# Altium PCB Pcb_BuckXL6009.PcbDoc
Units mm, origin at the board's own origin, x right, y up, seen from the top; angles counter-clockwise.
Board outline 45.34 x 25.4 mm, 2 copper layers (Top Layer, Bottom Layer); 9 components, 5 nets, 23 pads, 10 vias.
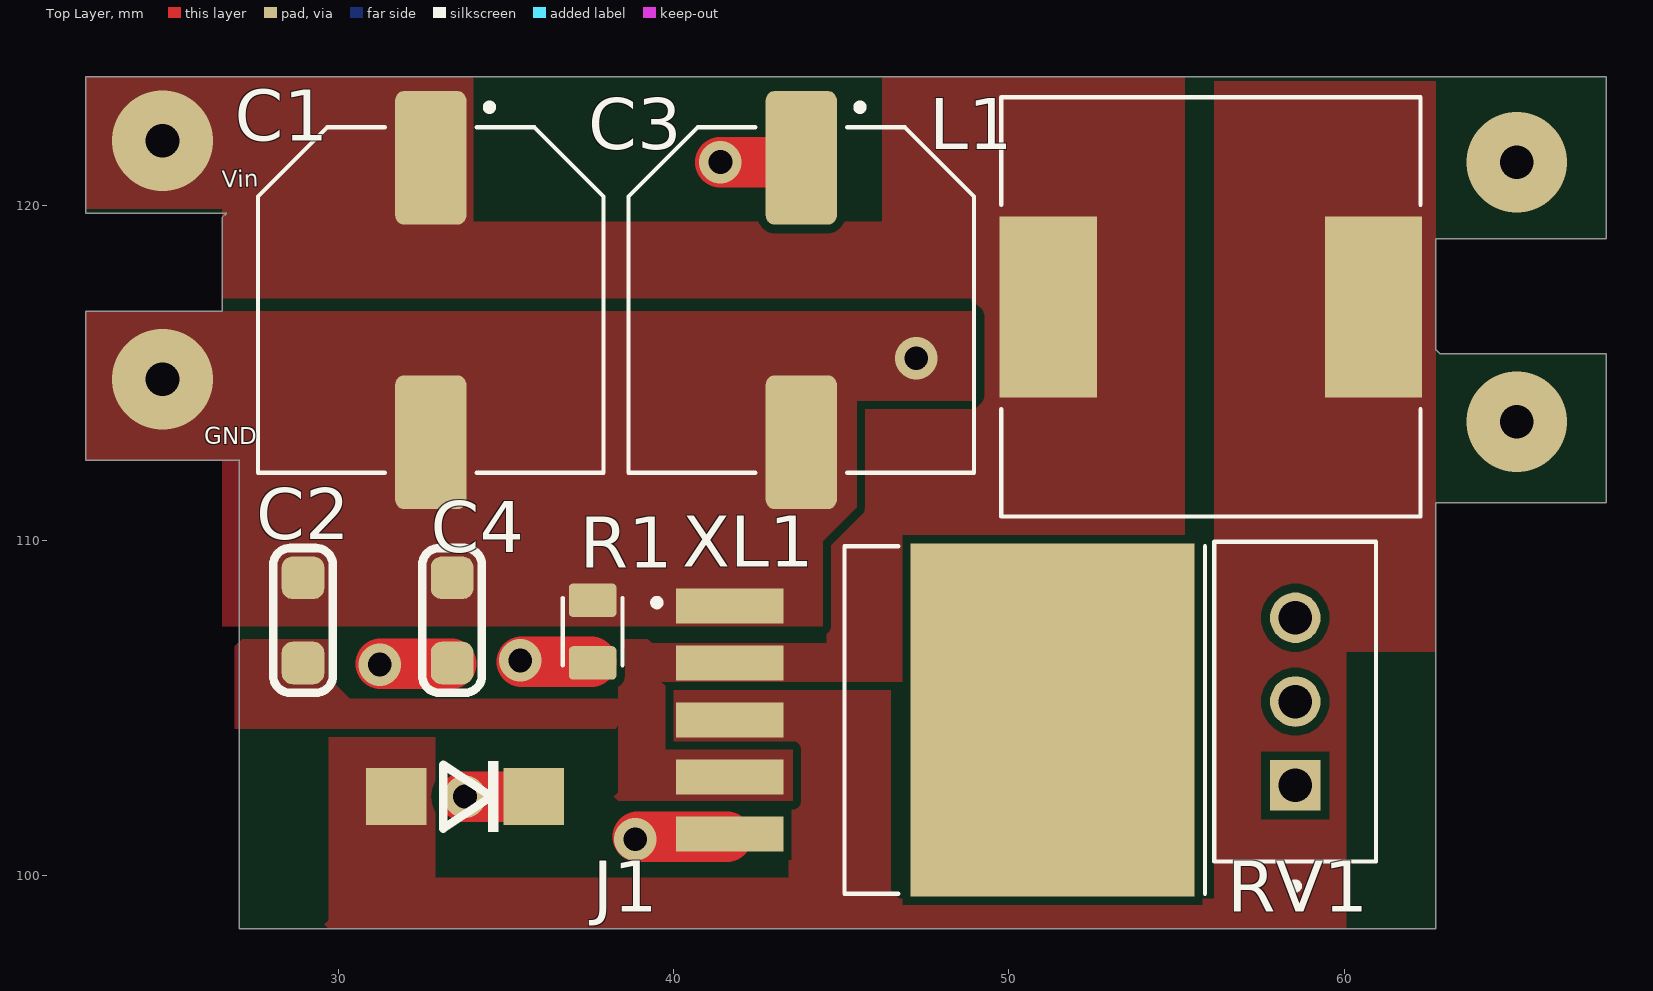
[diagram p0: Top Layer view]
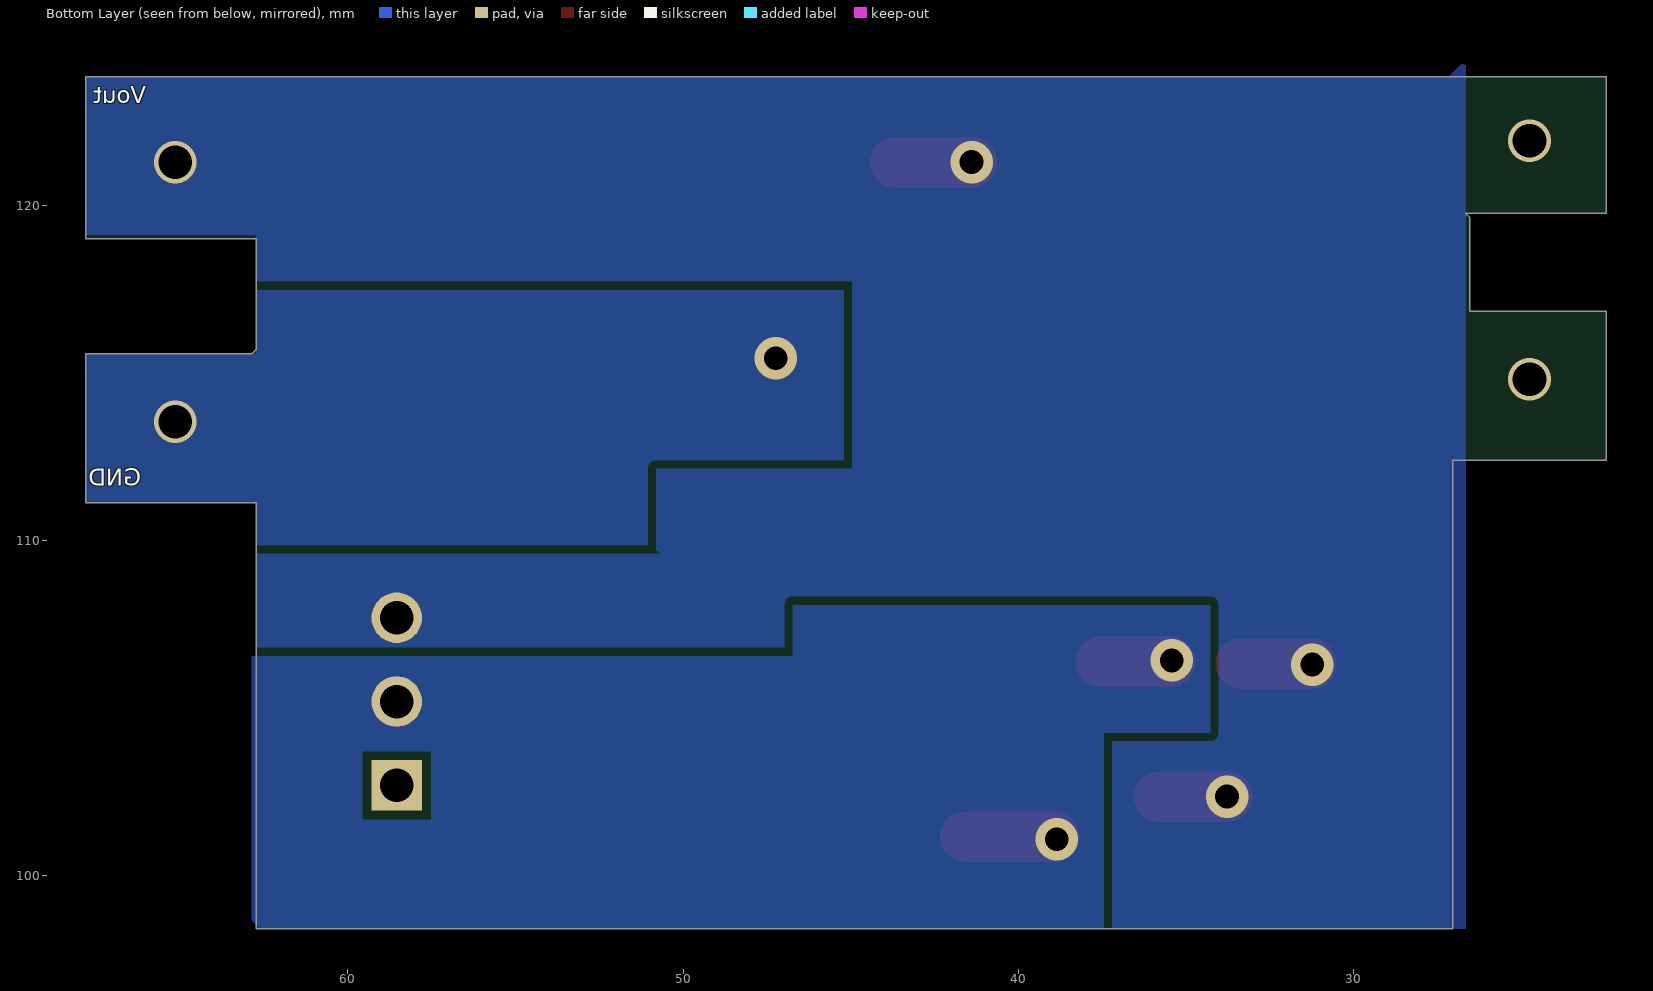
[diagram p1: Bottom Layer view, seen from below]
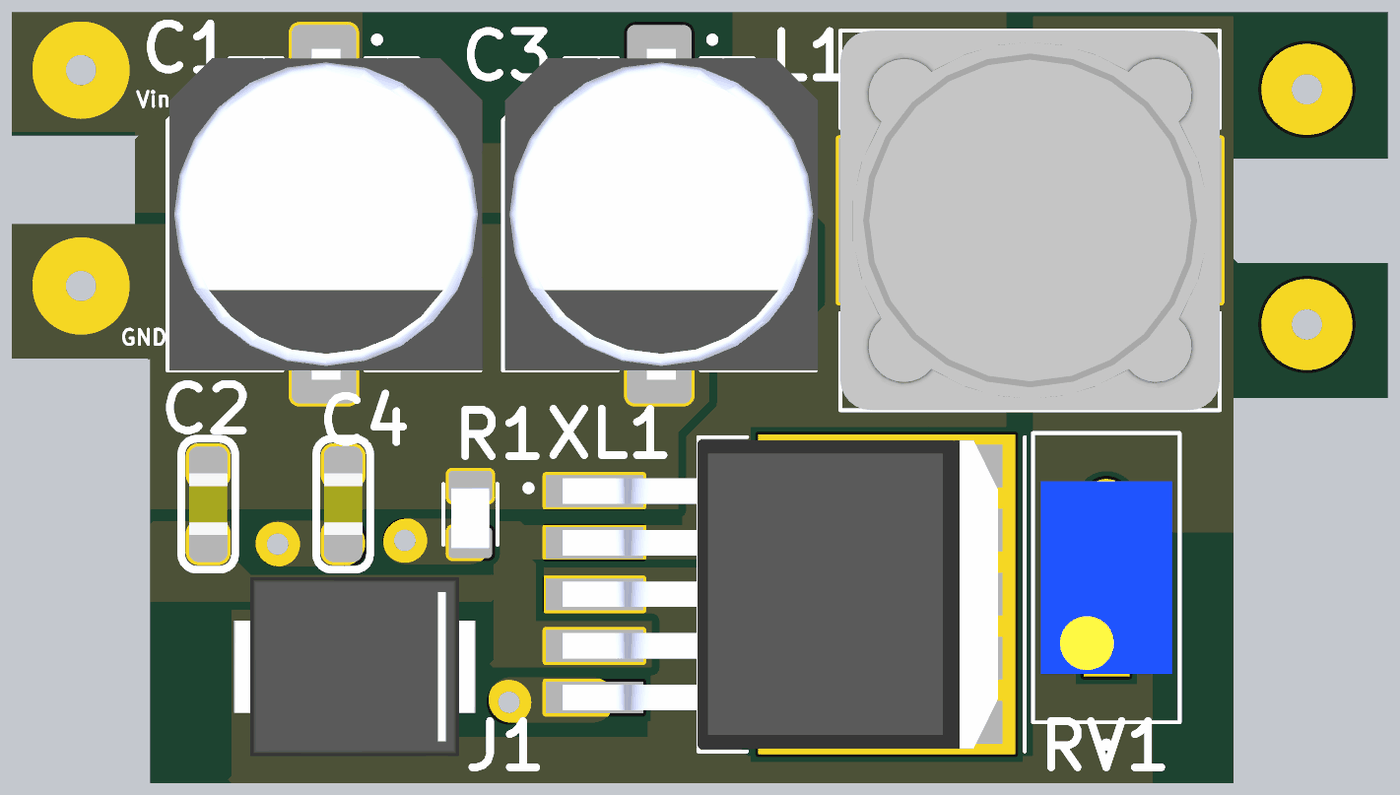
[diagram p2: 3D render of the assembled board from above, using the file's embedded part models]

## Layer stack, top to bottom
Top Solder: solder mask 0.0102, Solder Resist, Dk 3.5
Top Layer: signal copper 0.0356
Dielectric 1: dielectric 0.32, FR-4, Dk 4.8
Bottom Layer: signal copper 0.0356
Bottom Solder: solder mask 0.0102, Solder Resist, Dk 3.5

## Board outline
67.818,118.999 62.738,118.999 62.738,115.697 62.865,115.57 67.818,115.57 67.818,111.125 62.738,111.125 62.738,98.425 27.051,98.425 27.051,112.395 22.479,112.395 22.479,116.84 26.543,116.84 26.543,119.634 26.67,119.761 22.479,119.761 22.479,123.825 67.818,123.825

## Design rules (kind name [scope] priority, off if disabled: settings)
Clearance [All] p1: gap=0.254 ignorepadtopadclearanceinfootprint=FALSE except(0: Arc-Hole Track-Hole SMDPad-Hole THPad-Hole Via-Hole Fill-Hole Poly-Hole Region-Hole Text-Hole)
PolygonConnect [All] p1: connectstyle=Direct reliefconductorwidth=0.254 reliefentries=4 polygonreliefangle="90 Angle" airgapwidth=0.254
RoutingVias [All] p1: holewidth=0.711 width=1.27 viastyle="Through Hole" minholewidth=0.711 minwidth=1.27 maxholewidth=0.711 maxwidth=1.27
SolderMaskExpansion [All] p1: expansion=0.102 istentingtop=FALSE
Width [All] p1: maxlimit=1.5 minlimit=0.254 preferedwidth=0.254
30 further rules are at their usual default settings.

## Classes and differential pairs
component class Sch_BuckXL6009: C1 C2 C3 J1 L1 R1 RV1

## Components (designator, comment, footprint, x,y, rotation, side; value= is the part's Value field where it differs from the comment)
C1 "C_Aluminum" C_Aluminum 32.766,117.172 r270 top
C2 "Capacitor Ceramic" CAP_0805 28.956,107.618 r270 top value=33p
C3 "C_Aluminum" C_Aluminum 43.815,117.172 r270 top
C4 "Capacitor Ceramic" CAP_0805 33.401,107.618 r270 top value=33p
J1 "Diode" Diode(Wr) 33.782,102.362 r180 top
L1 "L_1260_330M" L_1260_330M 56.031,116.967 r180 top
R1 "Resistor_0805" Resistor_0805 37.592,107.283 r90 top
RV1 "Potentiometer" Potentiometer_ThroughHole 58.547,105.196 r90 top
XL1 "XL6009" XL6009 47.808,104.648 r0 top

## Footprints (in the part's own frame and the unit in brackets; to place one, negate y for a bottom-side part, rotate by r counter-clockwise, add the part's x,y. Pads: shape width x height; smd on the part's side, far side on the other; paste and mask are expansions set on the pad)
C_Aluminum [mm]
  rrect25% 3.99x2.12 smd: 1(-4.24,0) 2(4.24,0)
  silkscreen extent -5.85,-5.15 5.15,5.15, body extent -5.45,-5.08 5.45,5.22, height 11.05
CAP_0805 [mil]
  rrect50% 50x50 smd: 1(-50,0) 2(50,0)
  silkscreen extent -85,-35 85,35, body extent -40,-25 40,25, height 24
Diode(Wr) [mm]
  rect 1.8x1.7 smd: A(2.05,0) C(-2.05,0)
  silkscreen extent -1,-1.05 0.65,1.05, body extent -3.97,-2.85 3.97,3.05, height 2.47
L_1260_330M [mm]
  rect 2.9x5.4 smd: 1(-4.85,0) 2(4.85,0)
  silkscreen extent -6.25,-6.25 6.25,6.25, body extent -6.25,-6.25 6.25,6.25, height 6
Potentiometer_ThroughHole [mm]
  rect 1.508x1.508 hole 1: 1(-2.5,0)
  round 1.508 hole 1: 2(0,0) 3(2.5,0)
  silkscreen extent -5.6,-2.41 4.77,2.42, body extent -3.18,-2.16 3.17,2.16, height 7.87
Resistor_0805 [mm]
  rrect25% 1x1.42 smd: 1(-0.935,0) 2(0.935,0)
  silkscreen extent -1,-0.89 1,0.89, body extent -1.13,-0.62 0.87,0.63, height 0.6
XL6009 [mm]
  rect 3.21x1.05 smd: 1(-6.13,3.4) 2(-6.13,1.7) 3(-6.13,0) 4(-6.13,-1.7) 5(-6.13,-3.4)
  rect 8.46x10.53 smd paste-6: 6(3.5,0)
  silkscreen extent -8.4,-5.18 8.05,5.18, body extent -7.17,-5.08 7.17,5.08

## Part data
C1 C3: "220ÂµF 50V Aluminum Electrolytic Capacitors Radial, Can - SMD 1000 Hrs @ 105Â°C", Package="Radial Nichicon", Availability=Unavailable, MF=Nichicon, MP=UWT1H221MNL1GS, Price=None, SnapEDA_Link=https://www.snapeda.com/parts/UWT1H221MNL1GS/Nichicon/view-part/566503/?ref=snap
C2 C4: library part "Capacitor SMD", "Capacitor", LatestRevisionDate=17-Jul-2002, LatestRevisionNote="Re-released for DXP Platform.", PackageReference=RAD-0.3, Published=8-Jun-2000, Publisher="Altium Limited"
J1: "Diode; Repetitive Reverse Voltage Max, Vrrm: 40V; Forward Current, If(AV): 3A; Forward Surge Current Max, Ifsm: 100A;...", Package="SMC-2 ON Semiconductor", Availability=Good, Check_prices=https://www.snapeda.com/parts/SS34/ON%20Semiconductor/view-part/547583/?ref=eda, MF="ON Semiconductor", MP=SS34, Price=None, Purchase-URL=https://pricing.snapeda.com/search/part/SS34/?ref=eda, SnapEDA_Link=https://www.snapeda.com/parts/SS34/ON%20Semiconductor/view-part/547583/?ref=snap
L1: "33ÂµH Shielded Wirewound Inductor 3A 60mOhm Max Nonstandard", Package="Nonstandard Bourns", Availability=Unavailable, MF=Bourns, MP=SRR1260-330M, Price=None, SnapEDA_Link=https://www.snapeda.com/parts/SRR1260-330M/Bourns/view-part/378985/?ref=snap
R1: "CRG0805 1% 24K", Package=None, Availability=Unavailable, MP=1623163-1, Price=None
RV1: library part Potentiometer_ThroughHole, "25 kOhms 0.5W, 1/2W PC Pins Through Hole Trimmer Potentiometer Cermet 25 Turn Top Adjustment", Package="6332 Bourns", Availability=Bad, DigiKey-Purchase-URL=https://snapeda.com/shop?store=DigiKey&id=1448352, MF=Bourns, Mouser-Purchase-URL=https://snapeda.com/shop?store=Mouser&id=1448352, MP=PV36W253C01B00, Price=None, SnapEDA_Link=https://www.snapeda.com/parts/PV36W253C01B00/Bourns/view-part/1448352/?ref=snap
XL1: "The XL6009 regulator is a wide input range, current mode, DC/DC converter which is capable of generating either positive or negative output voltages.", Package="Package Analog Devices", Availability=Unavailable, MF=XLSEMI, MP=XL6009, Price=None, SnapEDA_Link=https://www.snapeda.com/parts/XL6009/XLSEMI/view-part/2888428/?ref=snap

## Via types
v1: diameter 1.27, hole 0.711, Top Layer to Bottom Layer, 6 vias
v2: diameter 3/1.27 (per signal layer), hole 1, Top Layer to Bottom Layer, 4 vias

## Nets (pads, with @x,y where several pads share a name; then routed paths per layer and width w, separated by ;. In a path a pad name is that pad's centre, name@x,y a point inside that pad or via, vN(x,y) a via of type N, cw(c..) or ccw(c..) an arc to the next point about the centre after c; other vN are vias at no path point)
GND: C1.2 C2.1 C3.2 C4.1 R1.2 XL1.1
  other v1: 47.244,115.435
  other v2: 65.151,113.538 24.765,114.808
NetC1_1: C1.1 C2.2 L1.2 XL1.2 XL1.4
  other v2: 24.765,121.92
NetC3_1: C3.1 C4.2 J1.C RV1.3 | length 6.7
  Top Layer w0.381: v1(31.242,106.299) v1@31.267,106.324 ; C4.2@33.376,106.324 C4.2 ; C3.1@43.688,121.285 C3.1
  Top Layer w1.5: v1@31.267,106.324 C4.2@33.376,106.324 ; v1(33.782,102.362) J1.C ; v1(41.402,121.285) C3.1@43.688,121.285
  other v2: 65.151,121.285
NetJ1_A: J1.A L1.1 XL1.3
NetR1_1: R1.1 RV1.2 XL1.5 | length 5.1
  Top Layer w0.254: v1(35.433,106.426) v1@35.472,106.387 ; R1.1@37.553,106.387 R1.1
  Top Layer w0.381: v1(38.862,101.092) v1@38.94,101.17 ; XL1.5@41.6,101.17 XL1.5
  Top Layer w1.5: v1@35.472,106.387 R1.1@37.553,106.387 ; v1@38.94,101.17 XL1.5@41.6,101.17
pads on no net: RV1.1 XL1.6

## Polygon pours and split planes (outlines as drawn)
NetC1_1 on Top Layer "Top Layer-NetC1_1" (solid, pour order 6): 26.543,119.888 22.479,119.888 22.479,123.825 34.036,123.825 34.036,119.507 46.228,119.507 46.228,123.825 55.245,123.825 55.245,109.982 46.99,109.982 46.99,105.791 46.863,105.791 44.577,105.791 40.005,105.791 39.624,105.791 39.751,105.664 39.751,103.759 43.561,103.759 43.561,102.235 38.354,102.235 38.227,102.362 38.353,102.488 38.353,107.061 39.243,107.061 39.37,106.934 44.577,106.934 44.577,109.728 45.711,110.862 45.689,114.137 45.725,114.173 45.852,114.046 48.895,114.046 48.895,117.221 26.543,117.221
GND on Top Layer "GND_L01_P001" (solid, pour order 1): 22.479,116.84 22.479,112.395 26.543,112.395 26.543,107.442 44.45,107.442 44.45,109.982 45.466,110.998 45.466,114.173 48.895,114.173 49.022,114.3 49.022,116.713 48.895,116.84
NetC1_1 on Top Layer "NETC1_1_L01_P007" (solid, pour order 7): 38.354,105.283 30.353,105.283 29.697,105.939 29.697,107.061 27.141,107.061 26.924,106.844 26.924,104.394 38.354,104.394
NetJ1_A on Top Layer "NETJ1_A_L01_P008" (solid, pour order 8): 62.738,106.68 60.071,106.68 60.071,98.425 29.718,98.425 29.591,98.552 29.718,98.679 29.718,104.394 32.893,104.394 32.893,99.949 43.434,99.949 43.434,103.632 43.529,103.727 39.819,103.727 39.819,105.791 46.482,105.791 46.482,99.568 46.736,99.314 56.134,99.314 56.134,123.698 62.738,123.698
GND on Bottom Layer "GND_L02_P019" (solid, pour order 19): 62.738,115.57 62.738,117.348 62.738,117.729 44.704,117.729 44.704,111.887 50.546,111.887 50.546,109.601 62.738,109.601 62.738,111.125 67.818,111.125 67.818,115.57
NetC3_1 on Bottom Layer "NETC3_1_L02_P017" (solid, pour order 17): 62.738,119.126 62.738,117.729 45.339,117.729 44.958,117.729 44.958,112.141 50.8,112.141 50.8,109.728 50.673,109.601 62.738,109.601 62.738,106.299 46.736,106.299 46.736,108.077 34.29,108.077 34.29,104.521 34.353,104.457 37.782,104.457 37.782,98.615 37.592,98.425 26.67,98.425 26.67,124.333 27.178,123.825 67.818,123.825 67.818,119.126
NetR1_1 on Bottom Layer "NETR1_1_L02_P015" (solid, pour order 15): 34.29,108.077 34.29,104.267 37.465,104.267 37.465,104.14 37.465,98.425 62.611,98.425 62.865,98.679 62.865,106.553 46.736,106.553 46.736,108.077

## Silkscreen, mask and mechanical layers (free items; w line width, h text height)
Top Overlay:
  text "Vin" at 26.543,120.523 h0.5 r1.79
  text "GND" at 26.008,112.876 h0.5
Bottom Overlay:
  text "Vout" at 66.012,123.036 h0.5
  text "GND" at 66.167,111.633 h0.5

## Dimensions
17.526,123.571 to 17.399,98.425 on Top Layer
22.606,129.794 to 67.945,128.905 on Top Layer